# EAGLE board Layout - SMD (EAGLE 4.16)
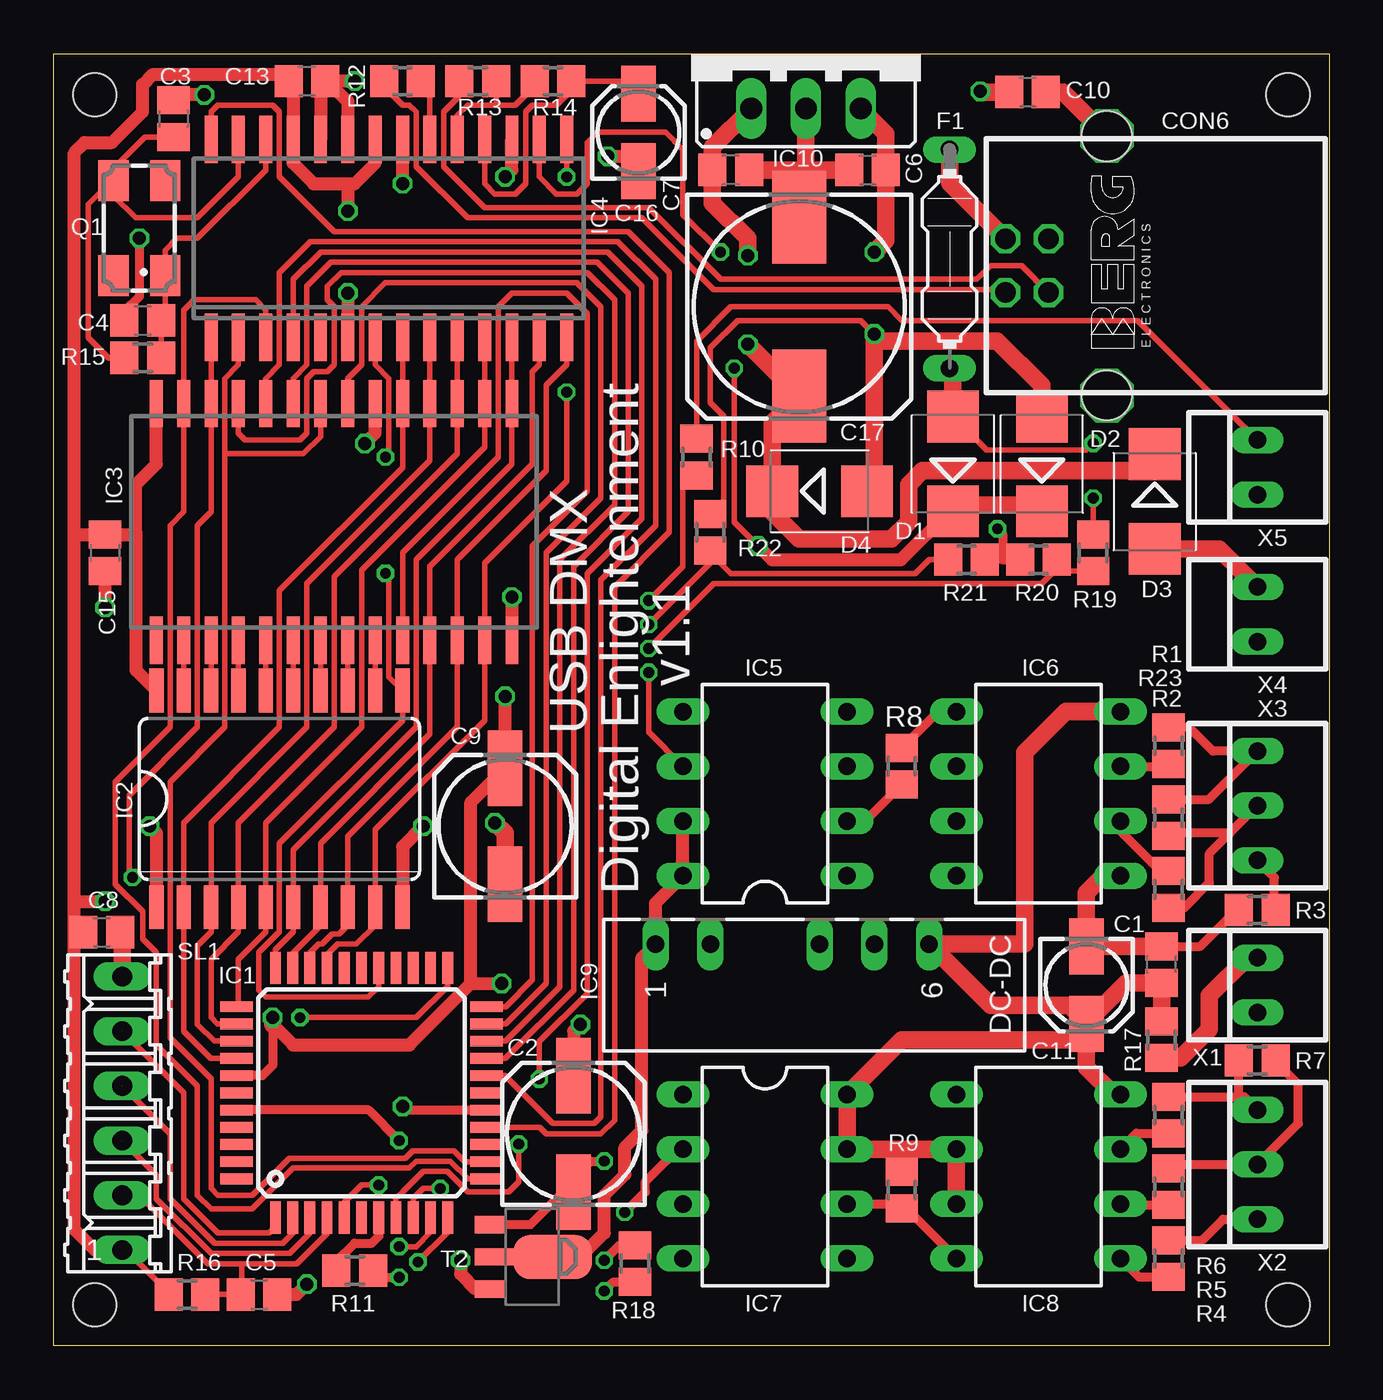
[diagram p0: board, top side]
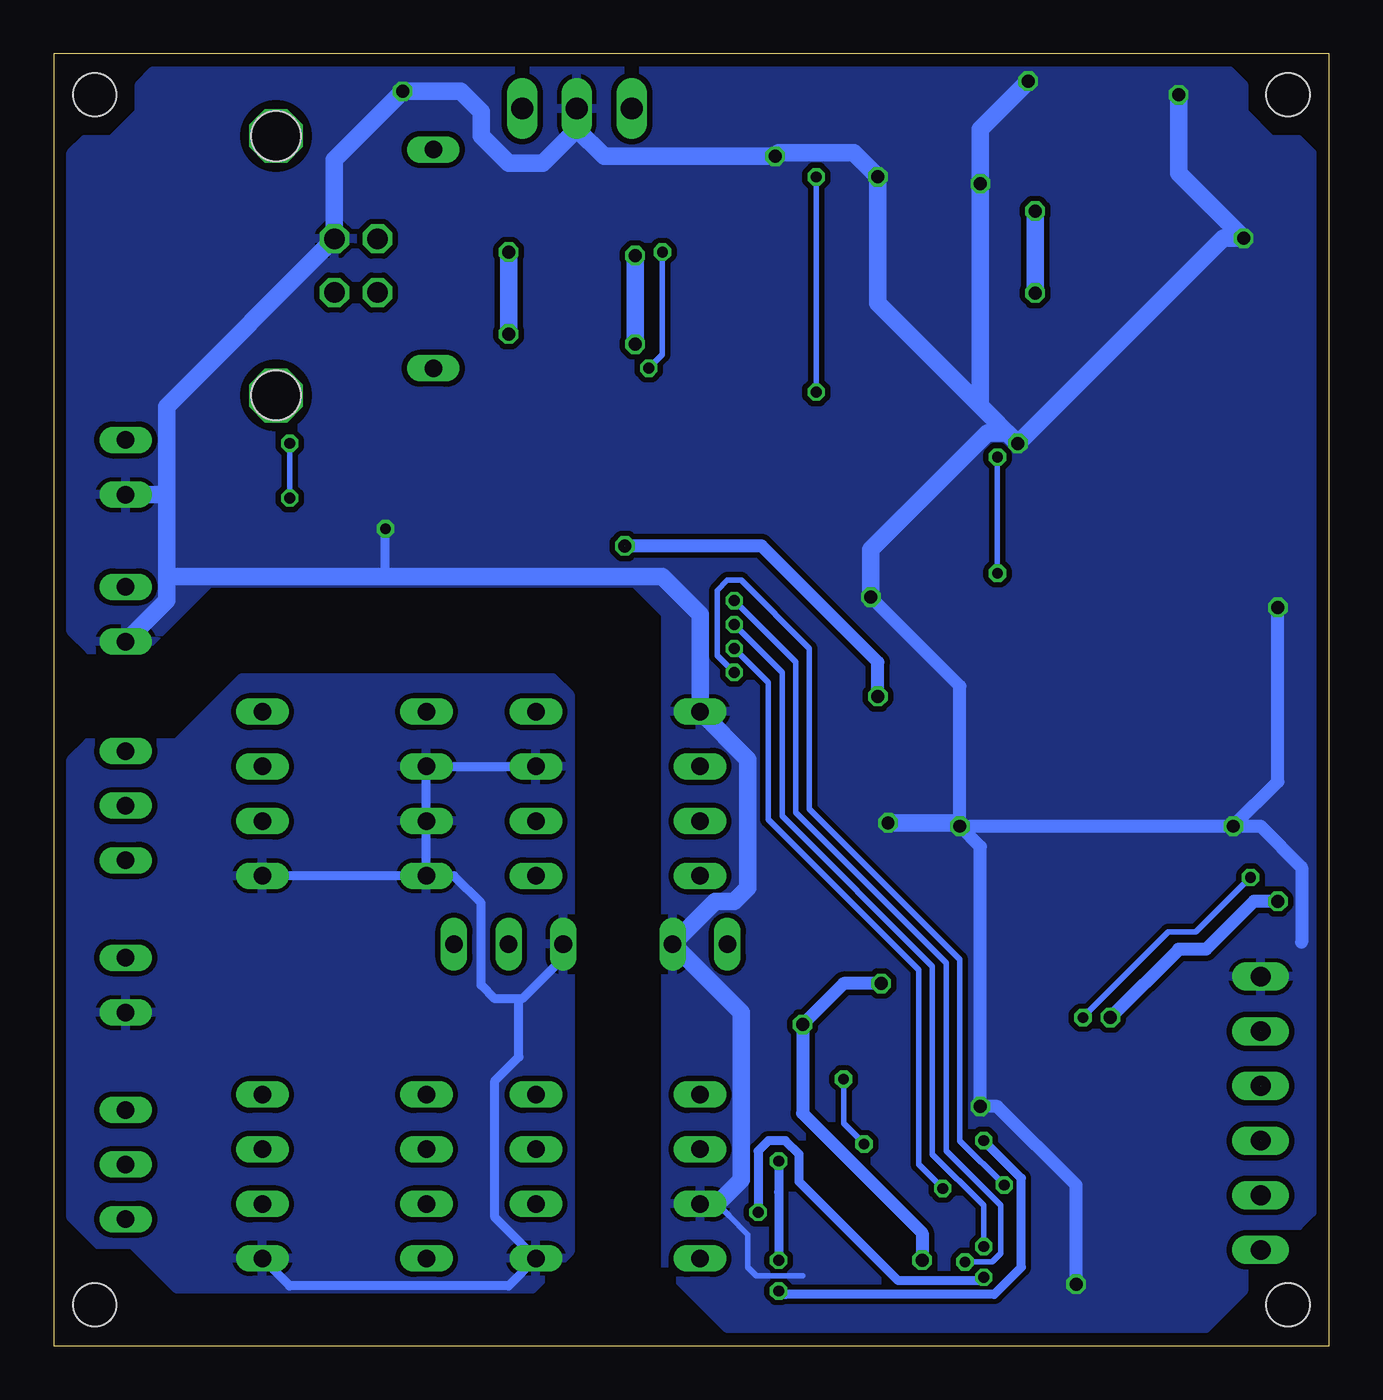
[diagram p1: board, bottom side, seen from below]

Size 59.21 x 60.01 mm. Coordinates in mm from the lower left corner, seen from the top.
Outline: 0,0 0,60.01 59.21,60.01 59.21,0 0,0
Copper layers (1*16): Top 0.035mm / dielectric 1.5mm / Bottom 0.035mm
Design rules "PCB-POOL": minimum track width 6mil, minimum drill 12mil, track to track 6mil, track to pad 6mil, pad to pad 6mil, via to via 6mil, smd to smd 6mil, copper to edge 20mil, drill to drill 8mil, minimum pad ring 8mil, minimum via ring 6mil, stop-mask expansion 3mil, vias tented up to drill 32mil, thermal gap 8mil
Holes 2 mm at 1.91,58.1 57.31,58.1 57.31,1.91 1.91,1.91

## Footprints (pad centres in the part's own frame; a part is rotated, then mirrored left to right if it is on the bottom)
C0805 = smd 1.3 x 1.5: 1 -0.85,0; 2 0.85,0
153CLV-0605 = smd 3.5 x 1.6: + 2.7,0; - -2.7,0
153CLV-0405 = smd 2.6 x 1.6: + 1.8,0; - -1.8,0
153CLV-1012 = smd 4.3 x 2.5: + 4.15,0; - -4.15,0
PN61729 = drill 0.95 octagon: 1 1.25,4.71; 2 -1.25,4.71; 3 -1.25,2.71; 4 1.25,2.71 | hole 2.3: -6.02,0; 6.02,0
SMB = smd 2.4 x 2.4: A 2.2,0; C -2.2,0
PICOFUSE = drill 0.813 long: 1 -5.08,0; 2 5.08,0
TQFP44 = smd 1.5 x 0.5: 1 -5.8,4; 2 -5.8,3.2; 3 -5.8,2.4; 4 -5.8,1.6; 5 -5.8,0.8; 6 -5.8,0; 7 -5.8,-0.8; 8 -5.8,-1.6; 9 -5.8,-2.4; 10 -5.8,-3.2; 11 -5.8,-4; 23 5.8,-4; 24 5.8,-3.2; 25 5.8,-2.4; 26 5.8,-1.6; 27 5.8,-0.8; 28 5.8,0; 29 5.8,0.8; 30 5.8,1.6; 31 5.8,2.4; 32 5.8,3.2; 33 5.8,4 | smd 0.5 x 1.5: 12 -4,-5.8; 13 -3.2,-5.8; 14 -2.4,-5.8; 15 -1.6,-5.8; 16 -0.8,-5.8; 17 0,-5.8; 18 0.8,-5.8; 19 1.6,-5.8; 20 2.4,-5.8; 21 3.2,-5.8; 22 4,-5.8; 34 4,5.8; 35 3.2,5.8; 36 2.4,5.8; 37 1.6,5.8; 38 0.8,5.8; 39 0,5.8; 40 -0.8,5.8; 41 -1.6,5.8; 42 -2.4,5.8; 43 -3.2,5.8; 44 -4,5.8
SO20W = smd 0.66 x 2.032: 1 -5.715,-5.029; 2 -4.445,-5.029; 3 -3.175,-5.029; 4 -1.905,-5.029; 5 -0.635,-5.029; 6 0.635,-5.029; 7 1.905,-5.029; 8 3.175,-5.029; 9 4.445,-5.029; 10 5.715,-5.029; 11 5.715,5.029; 12 4.445,5.029; 13 3.175,5.029; 14 1.905,5.029; 15 0.635,5.029; 16 -0.635,5.029; 17 -1.905,5.029; 18 -3.175,5.029; 19 -4.445,5.029; 20 -5.715,5.029
SOP28 = smd 0.6 x 2.2: 1 -8.255,-5.5; 2 -6.985,-5.5; 3 -5.715,-5.5; 4 -4.445,-5.5; 5 -3.175,-5.5; 6 -1.905,-5.5; 7 -0.635,-5.5; 8 0.635,-5.5; 9 1.905,-5.5; 10 3.175,-5.5; 11 4.445,-5.5; 12 5.715,-5.5; 13 6.985,-5.5; 14 8.255,-5.5; 15 8.255,5.5; 16 6.985,5.5; 17 5.715,5.5; 18 4.445,5.5; 19 3.175,5.5; 20 1.905,5.5; 21 0.635,5.5; 22 -0.635,5.5; 23 -1.905,5.5; 24 -3.175,5.5; 25 -4.445,5.5; 26 -5.715,5.5; 27 -6.985,5.5; 28 -8.255,5.5
SO28W = smd 0.6 x 2.2: 1 -8.255,-4.6; 2 -6.985,-4.6; 3 -5.715,-4.6; 4 -4.445,-4.6; 5 -3.175,-4.6; 6 -1.905,-4.6; 7 -0.635,-4.6; 8 0.635,-4.6; 9 1.905,-4.6; 10 3.175,-4.6; 11 4.445,-4.6; 12 5.715,-4.6; 13 6.985,-4.6; 14 8.255,-4.6; 15 8.255,4.6; 16 6.985,4.6; 17 5.715,4.6; 18 4.445,4.6; 19 3.175,4.6; 20 1.905,4.6; 21 0.635,4.6; 22 -0.635,4.6; 23 -1.905,4.6; 24 -3.175,4.6; 25 -4.445,4.6; 26 -5.715,4.6; 27 -6.985,4.6; 28 -8.255,4.6
DIL08 = drill 0.813 long: 1 -3.81,-3.81; 2 -1.27,-3.81; 3 1.27,-3.81; 4 3.81,-3.81; 5 3.81,3.81; 6 1.27,3.81; 7 -1.27,3.81; 8 -3.81,3.81
DIL08@1 = drill 0.813 long: 1 -2.54,-3.81; 2 0,-3.81; 3 2.54,-3.81; 4 5.08,-3.81; 5 5.08,3.81; 6 2.54,3.81; 7 0,3.81; 8 -2.54,3.81
NMA = drill 0.813 long: 1 0,6.35; 2 0,3.81; 4 0,-1.27; 5 0,-3.81; 6 0,-6.35
78XXS = drill 1.016 long: GND 0,-2.54; IN -2.54,-2.54; OUT 2.54,-2.54
CTS406 = smd 1.9 x 1.4: 1 -2.2,-1.2; 2 2.2,-1.2; 3 2.2,1.2; 4 -2.2,1.2
R0805 = smd 1.3 x 1.5: 1 -0.85,0; 2 0.85,0
06P = drill 0.914 long: 1 -6.35,0; 2 -3.81,0; 3 -1.27,0; 4 1.27,0; 5 3.81,0; 6 6.35,0
SOT89-BCE = smd 0.8 x 1.4: B -1.499,-1.981; E 1.499,-1.981 | smd 0.8 x 1.9: C 0,-1.727 | smd 2.032 x 3.65: C@1 0,0.94
22-23-2021 = drill 0.813 long: 1 -1.27,0; 2 1.27,0
22-23-2031 = drill 0.813 long: 1 -2.54,0; 2 0,0; 3 2.54,0

## Placement (x,y rotation side)
C1  100n  [C0805]  51.43,17.7 90 top
C2  47u  [153CLV-0605]  24.13,9.84 90 top
C3  15p  [C0805]  5.56,56.99 270 top
C4  15p  [C0805]  4.13,47.63 0 top
C5  100n  [C0805]  9.53,2.38 0 top
C6  100n  [C0805]  37.78,54.61 0 top
C7  100n  [C0805]  31.43,54.61 180 top
C8  100n  [C0805]  2.22,19.21 0 top
C9  47u  [153CLV-0605]  20.95,24.13 90 top
C10  100n  [C0805]  45.21,58.23 0 top
C11  10u  [153CLV-0405]  47.94,16.75 270 top
C13  100n  [C0805]  11.75,58.74 0 top
C15  100n  [C0805]  2.38,36.83 270 top
C16  1u  [153CLV-0405]  27.15,56.36 90 top
C17  470u  [153CLV-1012]  34.61,48.26 270 top
CON6  USB  [PN61729]  48.9,50.17 90 top
D1  BAT48  [SMB]  41.75,40.96 90 top
D2  BAT48  [SMB]  45.88,40.96 90 top
D3  BAT48  [SMB]  51.12,39.21 270 top
D4  BAT48  [SMB]  35.56,39.69 0 top
F1  0.375A, flink  [PICOFUSE]  41.59,50.48 270 top
IC1  MEGA8515  [TQFP44]  14.29,11.75 90 top
IC2  74HC573D  [SO20W]  10.48,25.4 0 top
IC3  6264-70 M  [SOP28]  13.02,38.26 0 top
IC4  USBN9604-28M  [SO28W]  15.56,51.44 0 top
IC5  6N137  [DIL08]  33.02,25.64 90 top
IC6  SN75176  [DIL08@1]  45.72,26.91 270 top
IC7  6N137  [DIL08]  33.02,7.86 270 top
IC8  SN75176  [DIL08@1]  45.72,9.13 270 top
IC9  SIM2-0505S SIL7  [NMA]  34.29,18.65 90 top
IC10  [78XXS]  34.92,60.01 0 top
Q1  24MHz  [CTS406]  3.97,51.91 90 top
R1  10  [R0805]  51.75,27.86 90 top
R2  10  [R0805]  51.75,21.19 270 top
R3  10  [R0805]  55.88,20.24 0 top
R4  10  [R0805]  51.75,4.05 270 top
R5  10  [R0805]  51.75,7.38 270 top
R6  10  [R0805]  51.75,10.72 270 top
R7  120  [R0805]  55.88,13.26 0 top
R8  470  [R0805]  39.37,26.91 90 top
R9  10K  [R0805]  39.37,7.22 90 top
R10  120  [R0805]  29.84,41.28 270 top
R11  470  [R0805]  13.97,3.49 0 top
R12  22  [R0805]  16.19,58.74 0 top
R13  22  [R0805]  19.68,58.74 0 top
R14  1K5  [R0805]  23.18,58.74 0 top
R15  1M  [R0805]  4.13,45.88 0 top
R16  47K  [R0805]  6.19,2.38 180 top
R17  220  [R0805]  51.44,14.21 90 top
R18  470  [R0805]  26.99,3.81 270 top
R19  2K2  [R0805]  48.26,36.83 90 top
R20  47K  [R0805]  45.72,36.51 180 top
R21  47K  [R0805]  42.39,36.51 0 top
R22  2K2  [R0805]  30.48,37.78 90 top
R23  120  [R0805]  51.75,24.53 270 top
SL1  ISP  [06P]  3.17,10.8 90 top
T2  BC869  [SOT89-BCE]  22.23,4.13 270 top
X1  DMX_EN  [22-23-2021]  55.88,16.75 90 top
X2  DMX_OUT  [22-23-2031]  55.88,8.41 90 top
X3  DMX_IN  [22-23-2031]  55.88,25.08 90 top
X4  EXT_IN  [22-23-2021]  55.88,33.97 90 top
X5  USB_EN  [22-23-2021]  55.88,40.8 90 top

## Library data of the parts
C1-C11 C13 C15-C17 R1-R23 = rcl
CON6 = con-berg
D1-D4 = diode
F1 = fuse
IC1 = atmel
IC2 = 74xx-eu
IC3 = memory-sram
IC4 = smd-ipc
IC5 IC7 = optocoupler
IC6 IC8 = user
IC9 = dc-dc-converter
IC10 = v-reg
Q1 = crystal
SL1 = con-amp-quick
T2 = transistor
X1-X5 = con-molex

## Nets
/RD: IC1.13 IC3.22 IC4.2
/WR: IC1.12 IC3.27 IC4.3
A0: IC2.19 IC3.2
A1: IC2.18 IC3.3
A2: IC2.17 IC3.4
A3: IC2.16 IC3.5
A4: IC2.15 IC3.6
A5: IC2.14 IC3.7
A6: IC2.13 IC3.8
A7: IC2.12 IC3.9
A8: IC1.18 IC3.24
A9: IC1.19 IC3.23
A10: IC1.20 IC3.25
A11: IC1.21 IC3.21
A12: IC1.22 IC3.10
A13: IC1.23 IC3.26 IC4.1
AD0: IC1.37 IC2.2 IC3.19 IC4.8
AD1: IC1.36 IC2.3 IC3.18 IC4.9
AD2: IC1.35 IC2.4 IC3.17 IC4.10
AD3: IC1.34 IC2.5 IC3.16 IC4.11
AD4: IC1.33 IC2.6 IC3.15 IC4.12
AD5: IC1.32 IC2.7 IC3.11 IC4.13
AD6: IC1.31 IC2.8 IC3.12 IC4.14
AD7: IC1.30 IC2.9 IC3.13 IC4.15
ALE: IC1.27 IC2.11 IC4.7
AVR_CLK: IC1.15 IC4.28
DMX_IN_+: R1.2 R23.1 X3.3
DMX_IN_-: R2.2 R23.2 X3.2
DMX_IN_DATA: IC6.1 R8.2
DMX_IN_GND: R3.2 X3.1
DMX_IN_R_+: IC6.7 R1.1
DMX_IN_R_-: IC6.6 R2.1
DMX_IN_R_DATA: IC5.2 R8.1
DMX_OUT_+: R6.1 R7.1 X2.3
DMX_OUT_DATA: IC7.6 IC8.4 R9.1
DMX_OUT_GND: R4.1 X2.1
DMX_OUT_R_+: IC8.7 R6.2
DMX_OUT_R_-: IC8.6 R5.2
DMX_RXD: IC1.5 IC5.6
DMX_TXD: IC1.7 R11.1
DMX_TXD_R: IC7.2 R11.2
EXT_IN: D3.A X4.2
EXT_V_IN: C7.2 C17.+ D3.C D4.C IC10.IN
EXT_VCC: C6.2 D2.A D4.A IC10.OUT R22.2
EXT_VCC_SENSE: IC1.10 R21.1 R22.1
GND: C3.1 C4.1 C5.2 C6.1 C7.1 C8.2 C9.- C10.1 C13.2 C15.2 C16.- C17.- CON6.4 IC1.16 IC2.1 IC2.10 IC3.14 IC3.20 IC4.17 IC4.21 IC4.23 IC4.24 IC5.5 IC7.3 IC9.2 IC10.GND R20.2 R21.2 SL1.6 X4.1 X5.1
ISO_GND: C1.2 C11.- IC5.3 IC6.2 IC6.3 IC6.4 IC6.5 IC7.5 IC8.5 IC9.4 R3.1 R4.2 X1.1
ISO_LED: R17.1 X1.2
ISO_VCC: C1.1 C11.+ IC6.8 IC7.7 IC7.8 IC8.2 IC8.3 IC8.8 IC9.6 R9.2 R17.2
ISP_MISO: IC1.2 SL1.4
ISP_MOSI: IC1.1 SL1.5
ISP_SCK: IC1.3 SL1.3
LED_USB: IC1.11 R10.2
LED_USB_R: R10.1 X5.2
N$1: C5.1 IC1.4 R16.1 SL1.2
N$5: R5.1 R7.2 X2.2
TRANSCEIVER_ENAB: IC1.40 R18.2
TRANSCEIVER_ENABLE_R: C2.- R18.1 T2.B
TRANSCEIVER_VCC: IC5.7 IC5.8 IC9.1 T2.C
USB_D+: CON6.3 R13.1
USB_D-: CON6.2 R12.1
USB_SHIELD: C10.2
USB_VCC: CON6.1 F1.1
USB_VCC_F: D1.A F1.2 R19.2
USB_VCC_SENSE: IC1.9 R19.1 R20.1
USBN_D+: IC4.19 R13.2 R14.1
USBN_D-: IC4.20 R12.2
USBN_INT: IC1.8 IC4.4
USBN_V3.3: C16.+ IC4.18 R14.2
USBN_XIN: C4.2 IC4.26 Q1.1 R15.2
USBN_XOUT: C3.2 IC4.27 Q1.3 R15.1
VCC: C2.+ C8.1 C9.+ C13.1 C15.1 D1.C D2.C IC1.38 IC2.20 IC3.28 IC4.6 IC4.16 IC4.22 IC4.25 R16.2 SL1.1 T2.E

## Tracks (layer width: path | path; a pad name or v marks a point on that pad's centre or on a via)
$2  (via drill 2.18)
  other vias: 48.9,44.13
/RD
  Top 0.254: IC4.2 8.57,45.56 7.94,44.93 7.94,41.43 | 7.94,41.43 11.59,41.43 12.38,42.23 IC3.22 | 7.94,41.43 7.94,28.73 5.4,26.19 5.4,14.29 7.3,12.38 7.3,7.3 7.62,6.99 9.21,6.99 10.93,8.71 16.33,8.71 16.67,9.05 18.57,9.05 19.07,8.55 IC1.13
/WR
  Top 0.254: IC4.3 9.84,48.1 9.37,48.58 6.51,48.58 6.03,48.1 IC3.27 6.03,38.74 5.4,38.1 5.4,28.73 2.86,26.19 2.86,21.43 4.13,20.16 4.13,18.89 4.76,18.26 4.76,13.97 6.67,12.07 6.67,6.99 7.3,6.35 9.21,6.35 11.11,8.26 16.51,8.26 16.83,8.57 18.41,8.57 19.24,7.75 IC1.12
A0
  Top 0.254: IC2.19 IC3.2
A1
  Top 0.254: IC2.18 IC3.3
A2
  Top 0.254: IC2.17 IC3.4
A3
  Top 0.254: IC2.16 IC3.5
A4
  Top 0.254: IC2.15 IC3.6
A5
  Top 0.254: IC2.14 IC3.7
A6
  Top 0.254: IC2.13 IC3.8
A7
  Top 0.254: IC2.12 IC3.9
A8
  Top 0.254: IC1.18 20.95,12.55 23.18,10.32 25.08,10.32 25.4,10.64 25.4,35.56 27.94,38.1 27.94,49.53 26.19,51.28 11.91,51.28 10.48,49.85 10.48,45.56 9.84,44.93 IC3.24
A9
  Top 0.254: IC1.19 20.97,13.35 24.13,16.51 24.13,36.2 26.67,38.74 26.67,48.9 25.24,50.32 12.86,50.32 11.75,49.21 11.75,45.56 11.11,44.93 IC3.23
A10
  Top 0.254: IC1.20 20.97,14.15 23.5,16.67 23.5,36.51 26.04,39.05 26.04,48.58 24.77,49.85 13.34,49.85 12.7,49.21 12.7,48.58 13.02,48.26 13.02,45.56 12.7,45.24 12.06,45.24 11.75,44.93 11.75,42.39 11.43,42.07 8.89,42.07 8.57,42.39 IC3.25
A11
  Top 0.254: IC1.21 20.98,14.95 22.86,16.83 22.86,36.83 25.4,39.37 25.4,48.26 24.29,49.37 15.4,49.37 14.29,48.26 14.29,45.56 13.65,44.93 IC3.21
A12
  Top 0.254: IC1.22 20.99,15.75 22.23,16.99 22.23,37.15 24.77,39.69 24.77,47.94 23.81,48.9 21.27,48.9 20.64,48.26 20.64,41.28 16.19,36.83 IC3.10
A13  (via drill 0.5)
  Top 0.254: v3.65,21.75 3.49,21.91 3.49,25.56 6.67,28.73 6.67,38.1 7.3,38.74 IC3.26 IC4.1 | v11.43,15.24 16.83,15.24 18.29,16.7 IC1.23
  Bottom 0.254: v11.43,15.24 7.46,19.21 6.19,19.21 v3.65,21.75
AD0
  Top 0.254: IC1.37 7.29,13.35 6.03,14.61 IC2.2 6.03,24.29 10.48,28.73 10.48,35.08 16.19,40.8 IC3.19 | IC3.19 16.19,43.82 | IC3.19 IC4.8
AD1
  Top 0.254: IC1.36 7.44,14.15 6.67,14.92 6.67,18.57 7.3,19.21 IC2.3 7.3,24.29 11.75,28.73 11.75,35.4 17.46,41.12 IC3.18 | IC3.18 17.46,43.82 | IC3.18 IC4.9
AD2
  Top 0.254: IC1.35 7.59,14.95 7.3,15.24 7.3,17.94 8.57,19.21 IC2.4 8.57,24.29 13.02,28.73 13.02,35.72 18.73,41.43 IC3.17 | IC3.17 18.73,43.82 | IC3.17 IC4.10
AD3
  Top 0.254: IC1.34 8.57,15.83 8.57,17.94 9.84,19.21 IC2.5 9.84,24.29 14.29,28.73 14.29,36.04 20,41.75 IC3.16 IC4.11
AD4
  Top 0.254: IC1.33 10.29,18.38 11.11,19.21 IC2.6 11.11,23.02 16.83,28.73 16.83,36.51 21.27,40.96 IC3.15 IC4.12
AD5
  Top 0.254: IC4.13 22.54,45.56 22.23,45.24 22.23,40.96 17.46,36.2 IC3.11 17.46,28.42 12.38,23.34 IC2.7 12.38,19.53 11.09,18.23 IC1.32
AD6
  Top 0.254: IC1.31 11.89,18.24 12.3,18.65 12.46,18.65 12.94,19.13 13.26,19.13 13.65,19.53 IC2.8 13.65,23.65 18.73,28.73 IC3.12 18.73,36.51 22.86,40.64 22.86,44.61 23.81,45.56 IC4.14
AD7  (via drill 0.5)
  Top 0.254: IC1.30 12.69,18.16 13.18,18.65 14.05,18.65 14.92,19.53 IC2.9 14.92,23.97 20,29.05 IC3.13 20,36.35 23.81,40.16 v23.81,44.29 | v23.81,54.29 IC4.15
  Bottom 0.254: v23.81,44.29 v23.81,54.29
ALE  (via drill 0.5)
  Top 0.254: IC1.27 15.09,16.68 14.61,16.19 9.84,16.19 9.53,16.51 9.53,18.26 10.48,19.21 10.48,23.34 16.19,29.05 IC2.11 15.56,31.06 15.56,35.72 v15.4,35.88 | IC4.7 14.92,45.56 15.56,44.93 15.56,41.43 | 15.56,41.43 15.56,41.59 | v15.4,41.28 15.56,41.43
  Bottom 0.254: v15.4,35.88 v15.4,41.28
AVR_CLK
  Top 0.254: IC4.28 7.3,57.31 7.62,57.63 10.16,57.63 10.48,57.31 10.48,54.29 13.02,51.75 26.67,51.75 28.57,49.85 28.57,37.78 26.04,35.24 26.04,10.48 25.4,9.84 22.86,9.84 22.55,10.15 IC1.15
DMX_IN_+
  Top 0.406: R1.2 52.73,28.71 53.82,27.62 X3.3 53.63,25.38 R23.1
DMX_IN_-  (via drill 0.6)
  Top 0.406: R2.2 52.49,20.34 53.66,21.51 53.66,22.86 54.61,23.81 | 54.61,23.81 X3.2 | 54.61,23.81 51.89,23.81 R23.2
  Bottom 0.406: X3.2
  other vias: 55.88,25.08
DMX_IN_DATA
  Top 0.406: R8.2 41.06,29.45 IC6.1
DMX_IN_GND
  Top 0.406: R3.2 56.67,20.24 56.67,21.75 X3.1 | R3.2
DMX_IN_R_+
  Top 0.406: R1.1 51.75,26.99 51.67,26.91 IC6.7
DMX_IN_R_-
  Top 0.406: R2.1 51.38,22.04 49.53,23.89 IC6.6 | IC6.6
DMX_IN_R_DATA
  Top 0.406: R8.1 37.68,24.37 IC5.2
DMX_OUT_+
  Top 0.406: X2.3 | R6.1 55.01,11.57 | 55.01,11.57 55.27,11.57 X2.3 | 55.01,11.57 55.01,11.59 55.03,11.61 R7.1
DMX_OUT_DATA
  Top 0.406: IC7.6 39.37,6.59 | 39.37,6.59 R9.1 | 39.37,6.59 IC8.4
DMX_OUT_GND
  Top 0.406: R4.1 53.32,4.9 54.29,5.87 X2.1 | X2.1
DMX_OUT_R_+
  Top 0.406: R6.2 50.27,9.87 IC8.7
DMX_OUT_R_-
  Top 0.406: R5.2 49.59,6.53 IC8.6
DMX_RXD  (via drill 0.5)
  Top 0.254: IC5.6 27.62,28.5 v27.62,31.27 | v15.08,7.46 14.29,7.46 13.49,6.66 IC1.5
  Bottom 0.254: v27.62,31.27 28.42,32.07 28.42,35.08 27.94,35.56 27.3,35.56 24.13,32.39 24.13,24.92 17.14,17.94 17.14,9.53 v15.08,7.46
DMX_TXD
  Top 0.406: IC1.7 15.09,5.09 14.76,4.76 13.97,4.76 13.12,3.91 R11.1
DMX_TXD_R  (via drill 0.5)
  Top 0.406: v26.51,6.19 27.46,7.14 27.46,7.62 28.97,9.13 IC7.2 | R11.2 15.14,3.18 v16.03,3.18
  Bottom 0.406: v26.51,6.19 26.51,9.05 26.04,9.53 25.24,9.53 24.61,8.89 24.61,7.62 20,3.02 16.19,3.02 v16.03,3.18
EXT_IN
  Top 0.813: X4.2 | D3.A 54.11,37.01 X4.2
EXT_V_IN  (via drill 0.6)
  Top 0.813: 34.61,44.13 v32.23,46.51 | D3.C 50.35,40.64 40.32,40.64 39.69,40.01 39.69,38.26 38.89,37.47 34.61,37.47 33.36,38.71 D4.C 33.36,42.89 34.61,44.13 | 34.61,44.13 C17.+ | v32.23,50.64 | v32.23,50.64 32.23,51.44 30.58,53.08 C7.2 30.58,55.67 IC10.IN
  Bottom 0.813: v32.23,46.51 v32.23,50.64
EXT_VCC  (via drill 0.6)
  Top 0.254: R22.2 31.11,39.27 31.11,43.18 30.48,43.82 30.48,46.36 31.75,47.63 37.47,47.63 v38.1,46.99
  Top 0.813: D2.A 45.88,44.61 43.81,46.67 38.42,46.67 v38.1,46.99 38.1,40.03 D4.A | IC10.OUT 38.63,56.3 C6.2 38.63,51.33 v38.1,50.8
  Bottom 0.813: v38.1,46.99 v38.1,50.8
EXT_VCC_SENSE  (via drill 0.5)
  Top 0.254: R21.1 40.64,36.51 40.01,35.88 31.43,35.88 30.48,36.83 | IC1.10 17.49,5.26 16.83,4.6 | v16.03,4.6 16.83,4.6 | 16.83,4.6 | 30.48,36.83 30.48,36.35 v27.62,33.5 | 30.48,36.83 R22.1
  Bottom 0.254: v27.62,33.5 26.35,32.23 25.4,31.27 25.4,24.61 18.41,17.62 18.41,8.89 16.03,6.51 v16.03,4.6
GND  (via drill 0.5, 0.6)
  Top 0.254: R21.2 43.18,36.51 | R21.2 | R20.2 | v43.81,37.94
  Top 0.406: IC1.16 16.36,10.95 v16.19,11.11 | 2.86,18.99 C8.2 | C4.1 3.28,48.05 3.97,48.74 v3.97,51.44 | 44.05,36.51 44.05,37.7 v43.81,37.94 | 44.05,36.51 R20.2 | 44.05,36.51 R21.2
  Top 0.61: IC2.10 16.19,23.18 v17.14,24.13 | v4.45,24.13 4.76,23.81 IC2.1 | v14.45,41.91 14.92,42.39 IC3.20 | v16.19,53.98 IC4.21 | v20.95,54.29 21.27,54.61 IC4.17 | v2.38,34.29 C15.2 | IC4.24 12.38,58.42 12.7,58.74 | IC4.23 13.65,57.79 12.7,58.74 | 12.7,58.74 C13.2 | v13.97,58.74 12.7,58.74 | C16.- 26.46,55.25 v25.72,55.25 | v21.27,34.77 IC3.14 | C3.1 5.82,58.1 v6.99,58.1 | C5.2 11.27,2.38 v11.75,2.86
  Top 0.813: 34.92,54.61 C17.- | IC10.GND 34.92,54.61 | 34.92,54.61 C7.1 | 34.92,54.61 C6.1 | v20.48,24.29 | v20.48,24.29 20.95,23.81 C9.- | C10.1 43.05,58.23 v43.02,58.26 | 2.86,18.99 3.17,18.99 SL1.6
  Bottom 0.254: 24.45,3.25 26.59,3.25 26.99,3.65 26.99,5.16 27.86,6.03 28.42,6.59
  Bottom 0.406: 43.81,35.72 v43.81,37.94
  Bottom 0.61: v17.14,24.13 v4.45,24.13 | v21.27,34.77 17.14,30.64 v17.14,24.13 | v2.38,34.29 2.38,26.19 v4.45,24.13 | v11.75,2.86 11.75,7.46 15.4,11.11 v16.19,11.11 16.19,23.18 v17.14,24.13 | 1.27,18.73 1.27,22.23 3.17,24.13 v4.45,24.13 | v17.14,24.13
  Bottom 0.813: 16.19,43.66 v16.19,53.98 16.19,56.52 v13.97,58.74 | v14.45,41.91 16.19,43.66 | 16.19,43.66 20.95,48.42 v20.95,54.29 22.07,55.4 25.56,55.4 v25.72,55.25 25.88,55.25 | v14.45,41.91 4.92,51.44 v3.97,51.44 6.99,54.45 v6.99,58.1 | 34.92,56.52 36.51,54.93 38.1,54.93 39.37,56.2 39.37,57.31 40.32,58.26 v43.02,58.26 46.19,55.1 CON6.4 53.98,43.63 53.98,39.53 | 25.88,55.25 | 25.88,55.25 33.02,55.25 33.66,55.25 34.92,56.52 | 34.92,56.52 IC10.GND | v17.14,24.13 17.3,24.29 v20.48,24.29 | IC7.3 28.42,6.59 27.3,7.7 27.3,15.48 IC9.2 28.5,20.64 27.62,20.64 26.99,21.27 26.99,27.23 IC5.5 29.21,33.97 30.96,35.72 43.81,35.72 53.98,35.72 | 53.98,39.53 X5.1 | X4.1 53.98,34.61 53.98,35.72 | 53.98,39.53 53.98,35.72 | v21.27,34.77 21.27,36.99 15.88,42.39 14.92,42.39 v14.45,41.91
  pour Bottom (isolate 0.254): 30.8,3.65 30.8,33.97 32.07,35.24 32.07,35.24 32.23,35.4 51.99,35.4 55.09,32.31 57.55,32.31 58.42,33.18 58.42,55.4 57.79,56.04 56.52,56.04 55.24,57.31 55.24,58.58 54.61,59.21 53.34,59.21 4.6,59.21 3.97,58.58 3.97,57.31 2.7,56.04 1.43,56.04 0.79,55.4 0.79,6.19 1.43,5.56 2.7,5.56 3.97,4.29 3.97,2.54 5.71,0.79 27.94,0.79
ISO_GND
  Top 0.406: R4.2 50.38,3.2 IC8.5 | 54.93,20.24 | 54.93,20.24 R3.1 | C1.2 53.24,18.55 54.93,20.24
  Top 0.813: 47.94,18.65 47.94,21.03 48.74,21.83 IC6.5 | 47.94,18.65 C11.- 47.94,18.49 48,18.55 C1.2 | 47.94,18.65 48.32,18.28
  Bottom 0.406: IC5.3 IC6.2 IC6.3 IC6.4 | IC6.4 IC6.5 | IC8.5 48.26,2.78 38.1,2.78 IC7.5 38.73,5.95 38.73,12.3 37.62,13.41 37.62,16.11 | 37.62,16.11 37.47,16.11 35.56,18.02 IC9.4 | 37.62,16.11 38.73,16.11 39.37,16.75 39.37,20.56 40.64,21.83 IC6.4 | 37.62,16.11
  pour Bottom (isolate 0.254): 35.24,30.24 35.24,4.37 36.99,2.62 53.5,2.62 55.56,4.68 57.15,4.68 58.42,5.95 58.42,27.23 57.63,28.02 53.5,28.02 50.48,31.04 36.04,31.04
ISO_LED
  Top 0.813: R17.1 52.33,13.36 53.66,14.68 53.66,16.27 55.4,18.02 X1.2
ISO_VCC
  Top 0.406: 39.37,8.33 R9.2
  Top 0.813: IC8.3 IC8.2 39.37,9.13 | 39.37,9.13 IC7.7 IC7.8 39.37,14.21 47.2,14.21 C11.+ | 39.37,9.13 39.37,8.33 | IC6.8 46.99,29.45 45.09,27.54 45.09,18.65 IC9.6 43.5,15.8 47.15,15.8 47.94,15 | IC8.8 49.21,11.67 47.94,12.94 C11.+ | 47.94,15 48.1,15.16 48.26,15 | C11.+ 47.94,15 | 47.94,15 49.79,16.85 C1.1 51.44,15 | 51.44,15 R17.2 | 51.44,15
ISP_MISO  (1 unrouted)
  Top 0.254: SL1.4 5.4,9.84 5.4,6.83 7.46,4.76 10.64,4.76 11.09,5.21 IC1.2
ISP_MOSI  (1 unrouted)
  Top 0.254: SL1.5 6.03,11.75 6.03,6.83 7.62,5.24 10,5.24 10.29,5.53 IC1.1
ISP_SCK  (1 unrouted)
  Top 0.254: SL1.3 4.76,7.94 4.76,6.83 7.3,4.29 10.95,4.29 11.89,5.22 IC1.3
LED_USB  (via drill 0.5)
  Top 0.254: IC1.11 18.29,5.24 18.26,5.24 v16.91,3.89 | v16.91,3.89 | v27.62,34.61 29.21,36.2 29.21,39.79 R10.2
  Bottom 0.254: v27.62,34.61 24.77,31.75 24.77,24.77 17.78,17.78 17.78,9.05 15.88,7.14 15.24,6.51 15.24,4.29 15.64,3.89 v16.91,3.89
LED_USB_R
  Top 0.254: R10.1 29.84,46.67 31.43,48.26 38.73,48.26 39.37,47.63 50.32,47.63 X5.2
N$1
  Top 0.254: IC1.4 12.69,5.23 11.27,3.81 8.73,3.81 | 8.73,3.81 7.14,3.81 3.97,6.99 | 8.73,3.81 | 8.73,2.38 8.73,3.81 | 8.73,2.38 C5.1 | R16.1 8.73,2.38 | 8.73,2.38 | 3.97,6.99 | 3.97,6.99 SL1.2
N$5
  Top 0.406: 53.1,8.41 X2.2 57.78,10.32 57.78,12.15 56.67,13.26 | 53.1,8.41 | R5.1 51.93,8.41 53.1,8.41 | 56.67,13.26 | 56.67,13.26 R7.2
TRANSCEIVER_ENAB  (via drill 0.5)
  Top 0.406: R18.2 25.98,2.96 v25.56,2.54 | IC1.40 14.61,10.95 v16.03,9.53
  Bottom 0.406: v25.56,2.54 25.4,2.38 25.24,2.38 15.56,2.38 14.29,3.65 14.29,7.78 v16.03,9.53
TRANSCEIVER_ENABLE_R  (via drill 0.5)
  Top 0.406: T2.B 22.14,5.63 23.5,6.99 24.13,6.99 C2.- 24.13,7.78 24.92,8.57 v25.56,8.57 | R18.1 26.25,4.66 v25.56,3.97
  Bottom 0.406: v25.56,3.97 25.56,7.14 v25.56,8.57
TRANSCEIVER_VCC
  Top 0.61: IC5.7 IC5.8 27.94,20.56 IC9.1 27.3,18.02 27.3,10 26.51,9.21 26.51,7.94 25.56,6.99 25.56,5.24 24.45,4.13 T2.C
USB_D+
  Top 0.254: R13.1 18.84,58.05 18.1,57.31 18.1,54.77 20,52.86 27.62,52.86 30.96,49.53 42.86,49.53 43.5,50.17 44.94,50.17 CON6.3
USB_D-
  Top 0.254: R12.1 15.34,58.48 16.19,57.63 16.51,57.63 16.83,57.31 16.83,54.77 19.21,52.39 27.3,52.39 30.64,49.05 42.23,49.05 | 42.23,49.05 | CON6.2 44.05,49.05 42.23,49.05
USB_SHIELD  (via drill 2.18)
  Top 0.813: C10.2 46.86,58.23 v48.9,56.2
USB_VCC
  Top 0.813: CON6.1 41.59,54.01 F1.1
USB_VCC_F  (via drill 0.5)
  Top 0.254: D1.A 43.32,41.59 47.94,41.59 v48.26,41.91 | v48.26,39.37 R19.2
  Top 0.813: D1.A 41.75,45.24 F1.2
  Bottom 0.254: v48.26,41.91 v48.26,39.37
USB_VCC_SENSE  (via drill 0.5)
  Top 0.254: v27.62,32.39 30.64,35.4 45.88,35.4 46.57,36.09 R20.1 46.51,36.51 47.05,35.98 R19.1 | IC1.9 16.69,6.85 17.14,7.3 v17.94,7.3
  Bottom 0.254: v27.62,32.39 26.51,31.27 26.04,30.8 26.04,24.45 19.05,17.46 19.05,8.41 v17.94,7.3
USBN_D+
  Top 0.254: IC4.19 18.73,57.15 19.21,57.63 20.48,57.63 | R14.1 22.33,58.52 21.43,57.63 20.48,57.63 | 20.48,57.63 | R13.2 20.54,57.68 20.48,57.63
USBN_D-
  Top 0.254: R12.2 17.46,58.32 IC4.20
USBN_INT  (via drill 0.5)
  Top 0.254: IC4.4 11.11,49.53 12.38,50.8 25.72,50.8 27.3,49.21 27.3,38.42 24.77,35.88 24.77,16.35 22.54,14.13 v22.54,12.38 | IC1.8 15.89,6.84 16.19,7.14 17.14,8.1 18.26,8.1 19.21,7.14 21.11,7.14 21.59,7.62 v21.59,9.37
  Bottom 0.254: v21.59,9.37 22.54,10.32 v22.54,12.38
USBN_V3.3
  Top 0.254: IC4.18 20,53.98 20.48,53.5 21.43,53.5 21.91,53.98 21.91,57.31 22.23,57.63 23.34,57.63 24.03,58.32 R14.2 26.57,58.74 C16.+
USBN_XIN
  Top 0.254: IC4.26 9.84,54.61 6.67,51.44 5.71,51.44 5.17,50.89 Q1.1 5.17,47.71 5.08,47.63 | C4.2 5.08,47.63 | R15.2 4.98,47.52 5.08,47.63
USBN_XOUT
  Top 0.254: IC4.27 8.57,54.29 6.67,52.39 3.81,52.39 2.77,53.43 Q1.3 | R15.1 2.54,45.88 1.59,46.83 1.59,53.02 2.7,54.13 2.88,54.27 Q1.3 | Q1.3 2.77,54.68 4.23,56.14 C3.2
VCC  (via drill 0.5, 0.6)  (1 unrouted)
  Top 0.254: v30.96,50.8 29.21,52.55 29.21,55.56 28.42,56.36 25.24,56.36 24.77,55.88 24.77,53.98 24.29,53.5 23.34,53.5 22.54,54.29 IC4.16 | v32.7,37.15 31.59,38.26 v31.59,45.4 | 5.4,2.38 | 5.4,2.38 R16.2 | SL1.1 3.33,4.45 5.4,2.38
  Top 0.406: IC1.38 9.69,12.55 10.16,13.02 v10.16,15.24
  Top 0.61: IC2.20 3.81,31.38 3.81,37.78 | 3.81,37.78 3.81,40.01 4.76,40.96 IC3.28 | IC4.22 14.92,54.93 13.97,53.98 13.65,53.98 | 3.81,37.78 3.71,37.68 C15.1 1.01,37.68 0.95,37.62 | v13.65,48.9 IC4.6 | 0.95,37.62 0.95,55.4 1.43,55.88 2.7,55.88 4.13,57.31 4.13,58.58 4.6,59.06 10.64,59.06 10.95,58.74 | 0.95,20.64 0.95,37.62 | 0.95,19.21 0.95,20.64 | 0.95,20.64 v2.38,20.64 | C9.+ 19.37,25.24 19.37,16.83 | 19.37,16.83 16.51,13.97 11.11,13.97 10.16,14.92 | D1.C 41.62,38.76 41.59,38.74 39.35,36.51 33.34,36.51 v32.7,37.15 | C9.+ 20.95,26.35 | C9.+ v20.95,30.16 | v24.45,14.92 24.13,14.61 C2.+ | 19.37,16.83 v20.8,16.83 | T2.E 19.6,2.63 18.89,3.33 v18.89,3.97 | 0.95,19.21 C8.1 | 10.95,58.74 | 10.95,58.74 C13.1 11.11,58.52 IC4.25 11.11,54.93 12.06,53.98 13.65,53.98 | 13.65,53.98 v13.65,52.71 | 0.95,19.21 0.95,5.4 1.91,4.45 SL1.1
  Top 0.813: v10.16,15.24 10.16,14.92 | D2.C 45.56,39.05 42.09,39.05 D1.C
  Bottom 0.254: v30.96,50.8 30.96,46.04 v31.59,45.4
  Bottom 0.61: v10.16,15.24 6.99,18.42 5.71,18.42 3.49,20.64 v2.38,20.64 | v32.7,37.15 26.35,37.15 20.95,31.75 v20.95,30.16 | v20.95,30.16 | v18.89,3.97 18.89,5.24 24.45,10.8 v24.45,14.92 22.54,16.83 v20.8,16.83
  Bottom 0.813: v13.65,52.71 v13.65,48.9

## Text on the board
tNames: v1.1 | USB DMX | Digital Enlightenment